# Allegro board CCS_1.brd
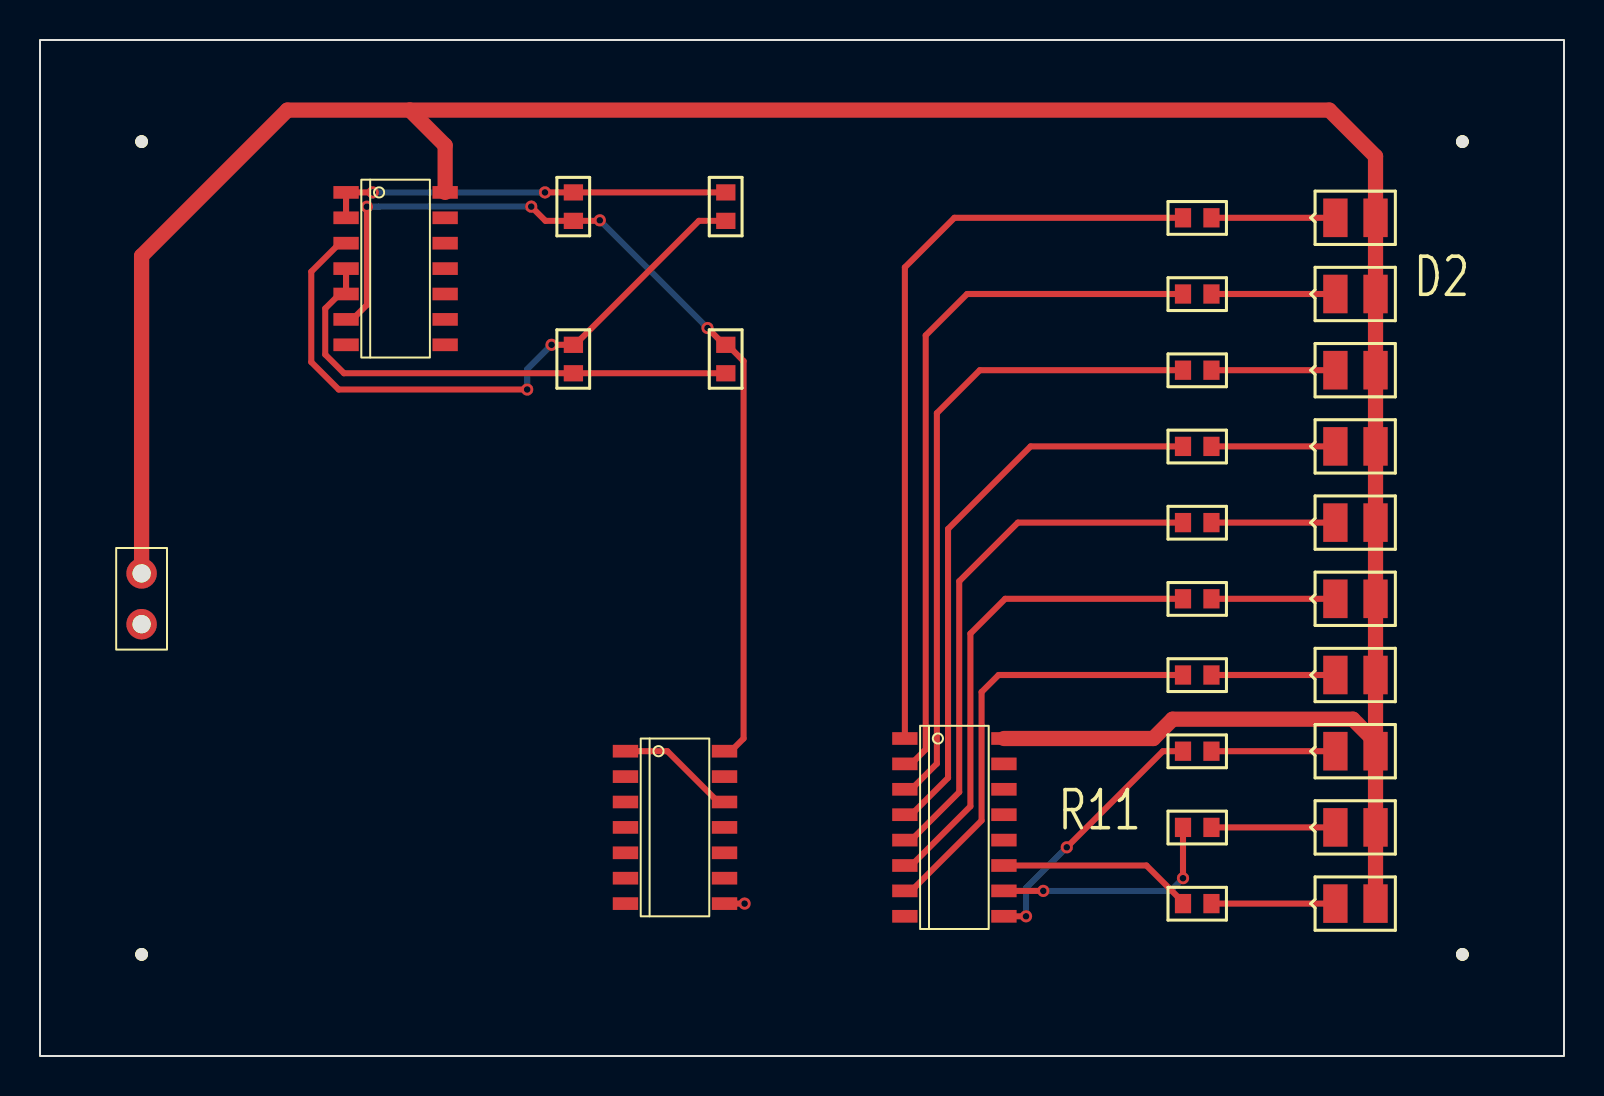
[diagram p0: board, top side]
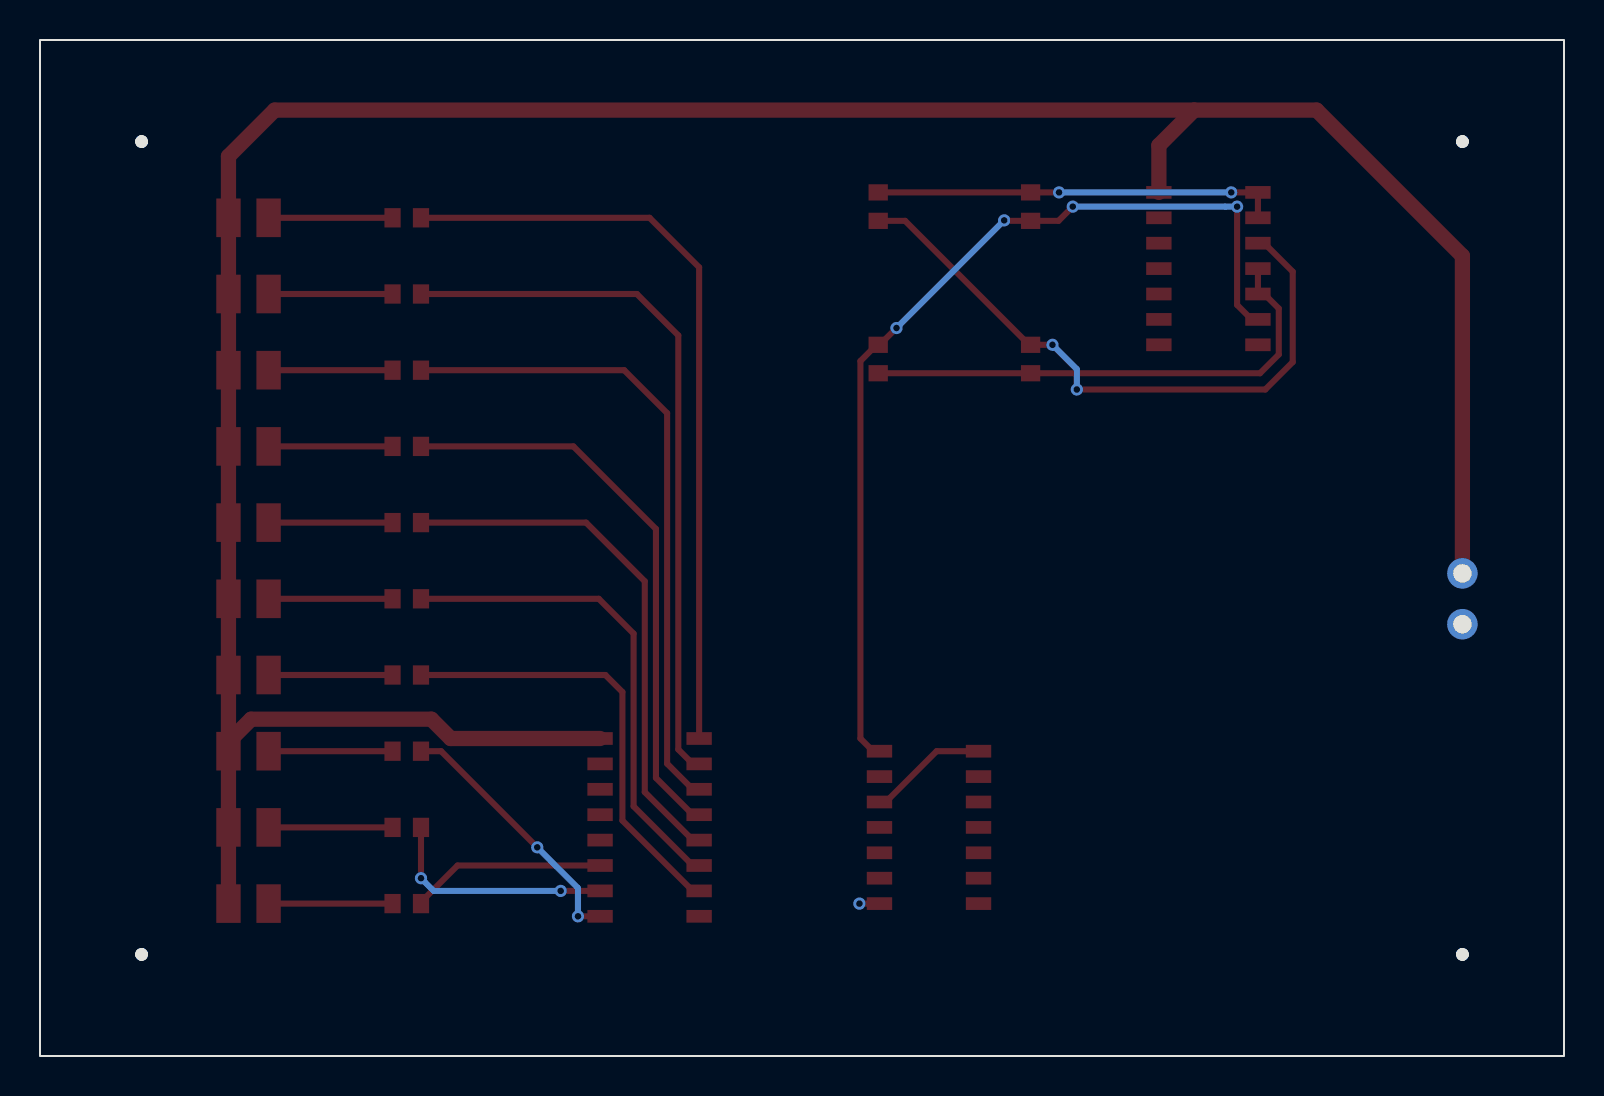
[diagram p1: board, bottom side, seen from below]

Outline 76.2 x 50.8 mm; copper layers: TOP, BOTTOM. Coordinates in mm from the lower left corner of the outline.
Outline path: rectangle 0,0 76.2,50.8

## Design rules (mm)
constraint set DEFAULT: min track width 0.305
nets with their own width: min track width 0.762; nets GND VCC

## Placement (name value [footprint] x y rotation side)
C1  47u  [SMC0603]  26.67 43.18 270 top
C2  47u  [SMC0603]  26.67 35.56 270 top
D1  LED  [SMD080512]  64.77 41.91 0 top
D2  LED  [SMD080512]  64.77 38.1 0 top
D3  LED  [SMD080512]  64.77 34.29 0 top
D4  LED  [SMD080512]  64.77 30.48 0 top
D5  LED  [SMD080512]  64.77 26.67 0 top
D6  LED  [SMD080512]  64.77 22.86 0 top
D7  LED  [SMD080512]  64.77 19.05 0 top
D8  LED  [SMD080512]  64.77 15.24 0 top
D9  LED  [SMD080512]  64.77 11.43 0 top
D10  LED  [SMD080512]  64.77 7.62 0 top
J1  CON2  [JUMPER2]  5.08 24.13 270 top
NOREF  -  [unnamed]  5.08 45.72 0 top
NOREF#2  -  [unnamed]  71.12 45.72 0 top
NOREF#3  -  [unnamed]  5.08 5.08 0 top
NOREF#4  -  [unnamed]  71.12 5.08 0 top
R1  1k  [SMR0603]  34.29 43.18 270 top
R2  1k  [SMR0603]  34.29 35.56 270 top
R3  100  [SMR0603]  57.15 41.91 0 top
R4  100  [SMR0603]  57.15 38.1 0 top
R5  100  [SMR0603]  57.15 34.29 0 top
R6  100  [SMR0603]  57.15 30.48 0 top
R7  100  [SMR0603]  57.15 26.67 0 top
R8  100  [SMR0603]  57.15 22.86 0 top
R9  100  [SMR0603]  57.15 19.05 0 top
R10  100  [SMR0603]  57.15 15.24 0 top
R11  100  [SMR0603]  57.15 11.43 0 top
R12  100  [SMR0603]  57.15 7.62 0 top
U1  7400  [SOIC14]  17.78 39.37 0 top
U2  7490  [SOIC14]  31.75 11.43 0 top
U3  7442  [SOIC16]  45.72 11.43 0 top

## Library data of the parts
C1 C2 = CAP NP
D1-D10 = LED
J1 = CON2: User Part Number: ***
R1-R12 = R
U1 = 7400: Tolerance: ***; User Part Number: ***
U2 = 7490: Tolerance: ***; User Part Number: ***
U3 = 7442: Tolerance: ***; User Part Number: ***

## Footprints (pads in the part's own frame, mm; a bottom-side part is the same pattern mirrored in y, then rotated)
JUMPER2
  round 1.524 hole 0.914: 1(0,0) 2(2.54,0)
SMC0603
  rect 0.813x0.965 smd: 1(0,0) 2(1.422,0)
SMD080512
  rect 1.219x1.93 smd: 1(0,0) 2(2.007,0)
SMR0603
  rect 0.813x0.965 smd: 1(0,0) 2(1.422,0)
SOIC14
  rect 1.27x0.635 smd: 1(-2.477,3.81) 2(-2.477,2.54) 3(-2.477,1.27) 4(-2.477,0) 5(-2.477,-1.27) 6(-2.477,-2.54) 7(-2.477,-3.81) 8(2.477,-3.81) 9(2.477,-2.54) 10(2.477,-1.27) 11(2.477,0) 12(2.477,1.27) 13(2.477,2.54) 14(2.477,3.81)
SOIC16
  rect 1.27x0.635 smd: 1(-2.477,4.445) 2(-2.477,3.175) 3(-2.477,1.905) 4(-2.477,0.635) 5(-2.477,-0.635) 6(-2.477,-1.905) 7(-2.477,-3.175) 8(-2.477,-4.445) 9(2.477,-4.445) 10(2.477,-3.175) 11(2.477,-1.905) 12(2.477,-0.635) 13(2.477,0.635) 14(2.477,1.905) 15(2.477,3.175) 16(2.477,4.445)
unnamed
  round 0.635 hole 3.175 unplated: (0,0)

## Nets
GND: J1.2 U1.7 U2.2 U2.3 U2.6 U2.7(R92) U2.10 U3.8
VCC: D1.2 D2.2 D3.2 D4.2 D5.2 D6.2 D7.2 D8.2 D9.2 D10.2 J1.1 U1.14 U2.5 U3.16
CLK: C1.2 R2.1 U1.6 U2.14
N00847: R3.1 U3.1
N00853: R4.1 U3.2
N00859: R5.1 U3.3
N00865: R6.1 U3.4
N00871: R7.1 U3.5
N00877: R8.1 U3.6
N00883: R9.1 U3.7
N00889: R10.1 U3.9
N00895: R11.1 U3.10
N00901: R12.1 U3.11(Y\9\)
N00905: D1.1(CATHODE) R3.2
N00911: D2.1(CATHODE) R4.2
N00917: D3.1(CATHODE) R5.2
N00923: D4.1(CATHODE) R6.2
N00929: D5.1(CATHODE) R7.2
N00935: D6.1(CATHODE) R8.2
N00941: D7.1(CATHODE) R9.2
N00947: D8.1(CATHODE) R10.2
N00953: D9.1(CATHODE) R11.2
N00959: D10.1(CATHODE) R12.2
N01162: U2.1 U2.12 U3.15
N01168: U2.9 U3.14
N01174: U2.8 U3.13
N01180: U2.11 U3.12
N01706: C2.1 R1.2 U1.3
N01732: C2.2 R2.2 U1.4 U1.5
N01891: C1.1 R1.1 U1.1 U1.2

Pads without a net: U1 8 9 10 11 12 13; U2 4 13

## Via types
v1: diameter 0.61, hole 0.33, TOP to BOTTOM, 13 vias

## Routing (per net, layer and track width the routed paths; a pad name or vN(x,y) marks a point on that pad's centre or on a via; arc(x,y) is an arc through that point)
VCC: length 143.2
  TOP w0.762: 66.78,15.71 D8.2 D9.2 D10.2 ; 66.78,15.71 65.64,16.84 56.63,16.84 55.67,15.88 U3.16 ; 66.78,15.71 D7.2 D6.2 D5.2 D4.2 D3.2 D2.2 D1.2 66.78,44.98 64.47,47.29 18.49,47.29 ; 18.49,47.29 20.26,45.53 U1.14 ; 18.49,47.29 12.37,47.29 5.08,40.01 J1.1
CLK: length 48.4
  TOP w0.305: v1(33.38,36.4) 34.21,35.56 R2.1 34.37,35.56 35.18,34.75 35.18,15.88 34.54,15.24 U2.14 ; U1.6 15.62,36.83 16.34,37.55 v1(16.34,42.47) ; v1(24.56,42.47) 25.27,41.76 C1.2 27.97,41.76 v1(27.99,41.78)
  BOTTOM w0.305: v1(33.38,36.4) v1(27.99,41.78) ; v1(16.34,42.47) 16.93,42.47 16.93,42.47 v1(24.56,42.47)
N00847: length 38.5
  TOP w0.305: R3.1 45.72,41.91 43.24,39.43 U3.1
N00853: length 35.8
  TOP w0.305: U3.2 43.56,14.61 44.28,15.33 44.28,36.03 46.35,38.1 R4.1
N00859: length 32.9
  TOP w0.305: 43.24,13.34 43.56,13.34 44.84,14.62 44.84,32.14 46.99,34.29 R5.1
N00865: length 28.8
  TOP w0.305: U3.4 43.56,12.06 45.4,13.91 45.4,26.35 49.53,30.48 R6.1
N00871: length 26.7
  TOP w0.305: R7.1 48.9,26.67 45.96,23.74 45.96,13.2 43.56,10.79 U3.5
N00877: length 24.5
  TOP w0.305: U3.6 43.56,9.53 46.52,12.48 46.52,21.12 48.26,22.86 R8.1
N00883: length 22.1
  TOP w0.305: R9.1 47.93,19.05 47.08,18.2 47.08,11.77 43.56,8.26 43.24,8.26
N00889: length 13.2
  TOP w0.305: v1(51.34,10.43) 56.14,15.24 R10.1 ; U3.9 v1(49.3,6.99)
  BOTTOM w0.305: v1(51.34,10.43) 49.3,8.4 v1(49.3,6.99)
N00895: length 11.8
  TOP w0.305: 48.2,8.26 v1(50.16,8.26) ; R11.1 v1(57.15,8.89)
  BOTTOM w0.305: v1(57.15,8.89) 56.52,8.26 v1(50.16,8.26)
N00901: length 9.8
  TOP w0.305: R12.1 57.15,7.7 55.32,9.53 U3.11
N00905: length 6.2
  TOP w0.305: R3.2 D1.1
N00911: length 6.2
  TOP w0.305: R4.2 D2.1
N00917: length 6.2
  TOP w0.305: R5.2 D3.1
N00923: length 6.2
  TOP w0.305: D4.1 R6.2
N00929: length 6.2
  TOP w0.305: R7.2 D5.1
N00935: length 6.2
  TOP w0.305: R8.2 D6.1
N00941: length 6.2
  TOP w0.305: D7.1 R9.2
N00947: length 6.2
  TOP w0.305: R10.2 D8.1
N00953: length 6.2
  TOP w0.305: D9.1 R11.2
N00959: length 6.2
  TOP w0.305: D10.1 R12.2
N01162: length 6
  TOP w0.305: U2.1 31.37,15.24 33.91,12.7 U2.12
N01174: length 1
  TOP w0.305: U2.8 v1(35.23,7.62)
N01706: length 32.2
  TOP w0.305: v1(24.36,33.32) 14.94,33.32 13.56,34.7 13.56,39.22 14.99,40.64 U1.3 ; v1(25.58,35.56) C2.1 26.75,35.56 32.94,41.76 R1.2
  BOTTOM w0.305: v1(24.36,33.32) 24.36,34.34 v1(25.58,35.56)
N01732: length 25.3
  TOP w0.305: R2.2 C2.2 15.2,34.14 14.26,35.07 14.26,37.38 14.99,38.1 U1.5 U1.4
N01891: length 20.3
  TOP w0.305: v1(25.25,43.18) C1.1 R1.1 ; U1.2 U1.1 v1(16.64,43.18)
  BOTTOM w0.305: v1(16.64,43.18) v1(25.25,43.18)
